# Altium PCB 1-PCB_PCB_Ecto-1.pcbdoc
Units mil, origin at the board's own origin, x right, y up, seen from the top; angles counter-clockwise.
Board outline 3925.2 x 4886.14 mil, 2 copper layers (Top Layer, Bottom Layer); 85 components, 55 nets, 284 pads, 72 vias.
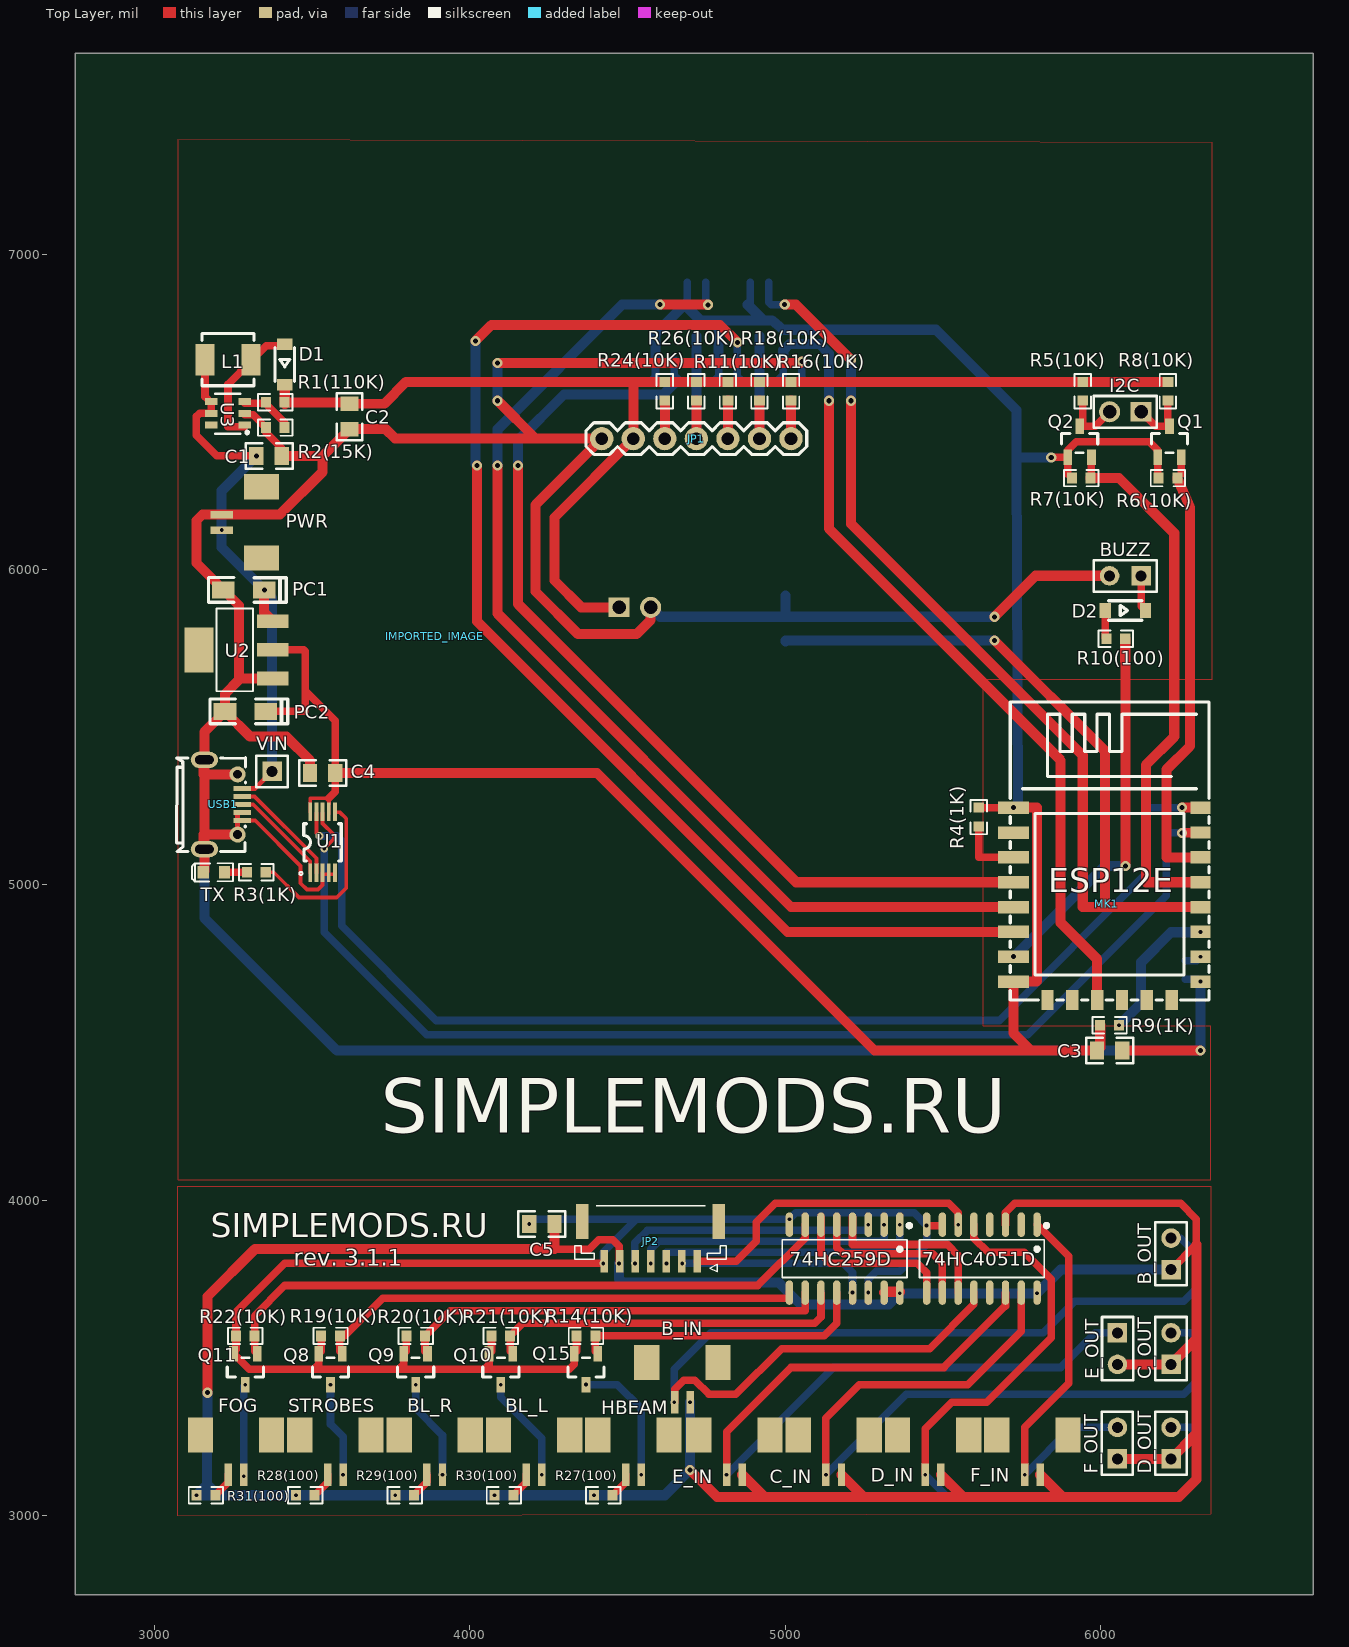
[diagram p0: Top Layer view]
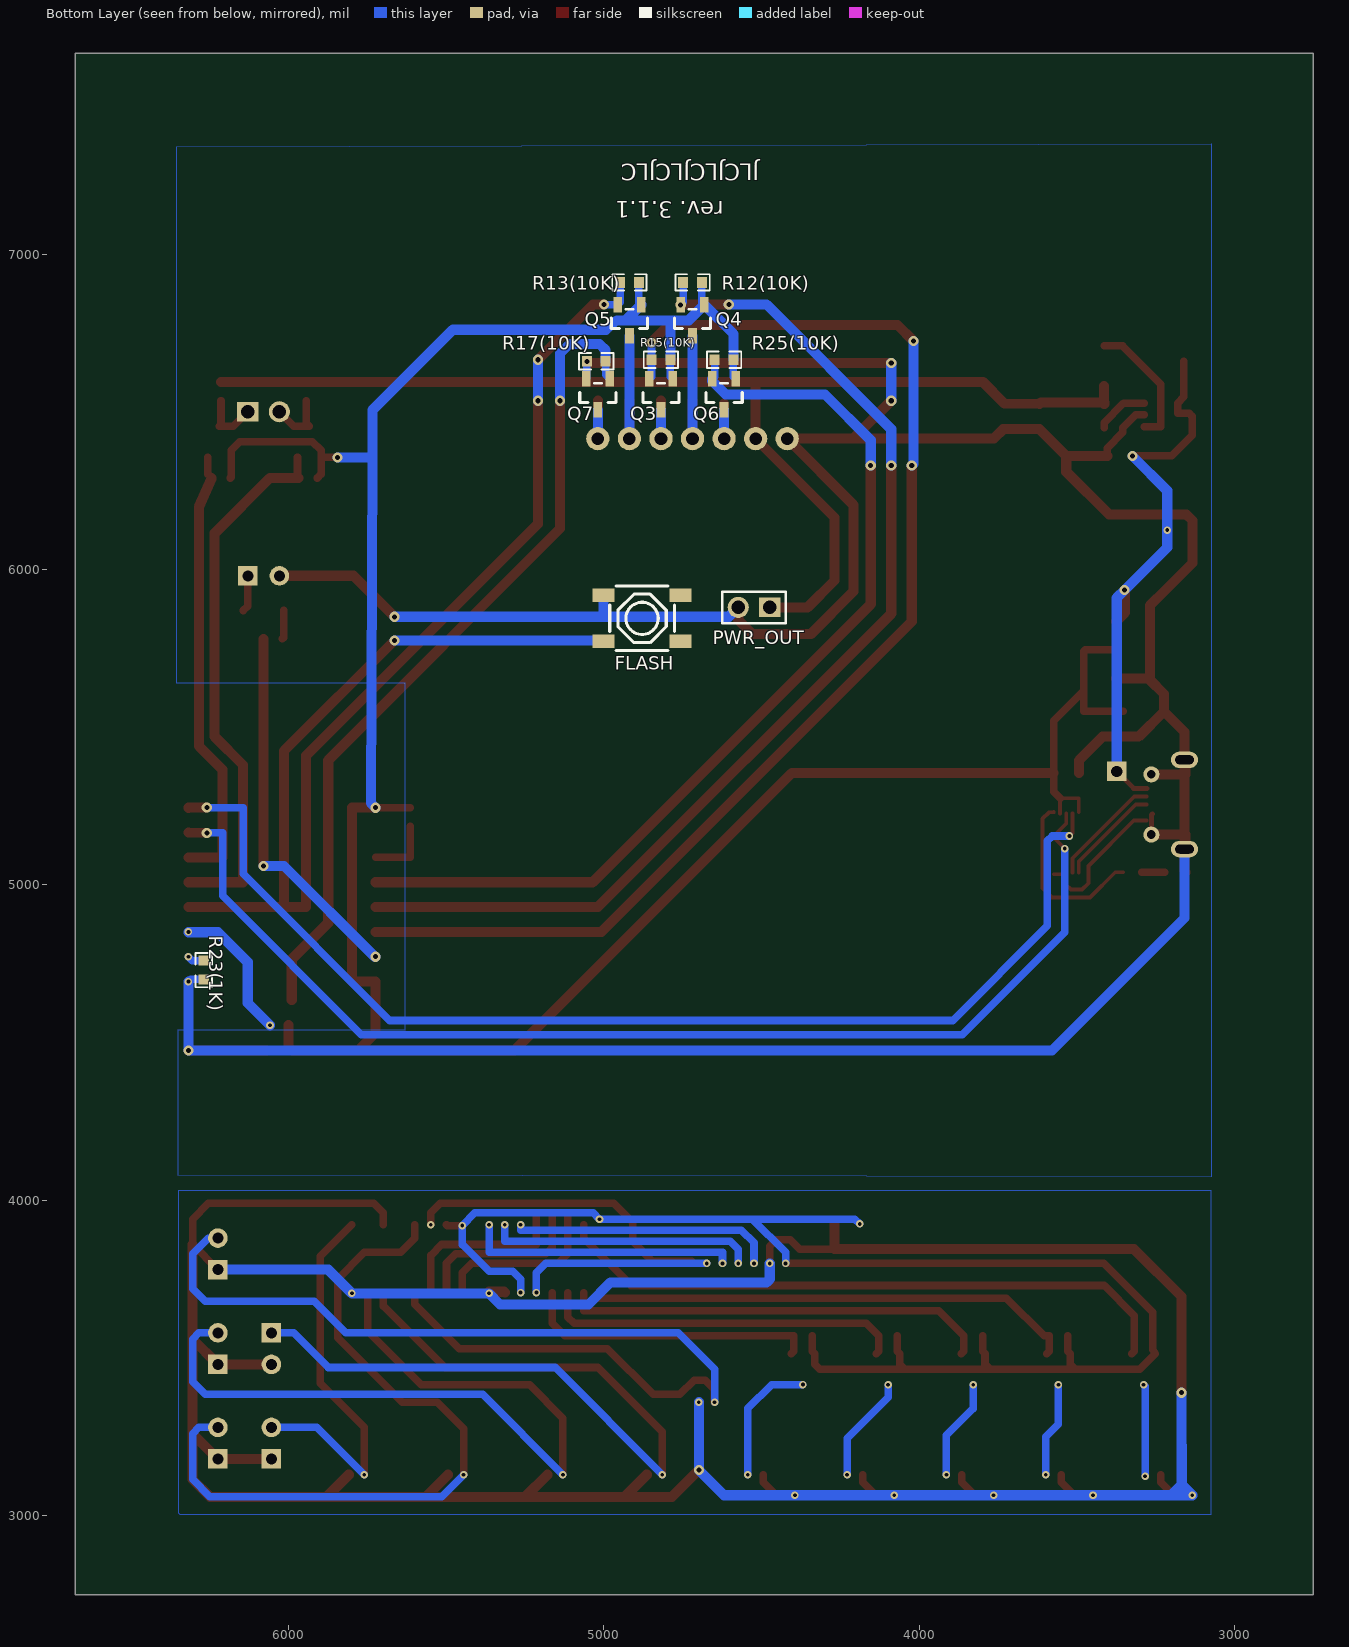
[diagram p1: Bottom Layer view, seen from below]

## Layer stack, top to bottom
Top Solder: solder mask 0.4, Solder Resist, Dk 3.5
Top Layer: signal copper 1.4
Dielectric 1: dielectric 12.6, FR-4, Dk 4.8
Bottom Layer: signal copper 1.4
Bottom Solder: solder mask 0.4, Solder Resist, Dk 3.5

## Board outline
6675.2,2750 2750,2750 2750,7636.14 6675.2,7636.14

## Design rules (kind name [scope] priority, off if disabled: settings)
AssemblyTestPointUsage [All] p0: scope1count=1 scope1_0_kind=Board scope1_0_value=Board scope2count=1 scope2_0_kind=Board scope2_0_value=Board commentlength=0
AssemblyTestpoint [All] p0: scope1count=1 scope1_0_kind=Board scope1_0_value=Board scope2count=1 scope2_0_kind=Board scope2_0_value=Board commentlength=0
Clearance [All] p0: scope1count=1 scope1_0_kind=Board scope1_0_value=Board scope2count=1 scope2_0_kind=Board scope2_0_value=Board commentlength=0 gap=10
Clearance [All] p1: gap=10 ignorepadtopadclearanceinfootprint=FALSE except(0: Arc-Hole Track-Hole SMDPad-Hole THPad-Hole Via-Hole Fill-Hole Poly-Hole Region-Hole Text-Hole)
ComponentClearance [All] p0: scope1count=1 scope1_0_kind=Board scope1_0_value=Board scope2count=1 scope2_0_kind=Board scope2_0_value=Board commentlength=0 gap=10 collisioncheckmode=3
DiffPairsRouting [All] p0: scope1count=1 scope1_0_kind=Board scope1_0_value=Board scope2count=1 scope2_0_kind=Board scope2_0_value=Board commentlength=0
FabricationTestPointUsage [All] p0: scope1count=1 scope1_0_kind=Board scope1_0_value=Board scope2count=1 scope2_0_kind=Board scope2_0_value=Board commentlength=0 valid=0 allowmultiple=FALSE
FabricationTestpoint [All] p0: scope1count=1 scope1_0_kind=Board scope1_0_value=Board scope2count=1 scope2_0_kind=Board scope2_0_value=Board commentlength=0 side=3 testpointundercomponent=TRUE minsize=40 maxsize=100 preferedsize=60 minholesize=0 maxholesize=40 preferedholesize=32 testpointgrid=1
FanoutControl Fanout_BGA [All] p0 off: scope1count=1 scope1_0_kind=Board scope1_0_value=Board scope2count=1 scope2_0_kind=Board scope2_0_value=Board commentlength=69 // Protel DXP Scope 1 Expression Was: IsBGA   Fanout_BGA (Default Rule)
FanoutControl Fanout_LCC [All] p0 off: scope1count=1 scope1_0_kind=Board scope1_0_value=Board scope2count=1 scope2_0_kind=Board scope2_0_value=Board commentlength=69 // Protel DXP Scope 1 Expression Was: IsLCC   Fanout_LCC (Default Rule)
FanoutControl Fanout_SOIC [All] p0 off: scope1count=1 scope1_0_kind=Board scope1_0_value=Board scope2count=1 scope2_0_kind=Board scope2_0_value=Board commentlength=71 // Protel DXP Scope 1 Expression Was: IsSOIC   Fanout_SOIC (Default Rule)
FanoutControl Fanout_Small [All] p0 off: scope1count=1 scope1_0_kind=Board scope1_0_value=Board scope2count=1 scope2_0_kind=Board scope2_0_value=Board commentlength=84 // Protel DXP Scope 1 Expression Was: (CompPinCount < 5)   Fanout_Small (Default Rule)
FanoutControl Fanout_Default [All] p0: scope1count=1 scope1_0_kind=Board scope1_0_value=Board scope2count=1 scope2_0_kind=Board scope2_0_value=Board commentlength=30 // Fanout_Default (Default Rule)
Height [All] p0: scope1count=1 scope1_0_kind=Board scope1_0_value=Board scope2count=1 scope2_0_kind=Board scope2_0_value=Board commentlength=0
HoleSize [All] p0: scope1count=1 scope1_0_kind=Board scope1_0_value=Board scope2count=1 scope2_0_kind=Board scope2_0_value=Board commentlength=0 absolutevalues=TRUE maxlimit=100 minlimit=1 maxpercent=80.000 minpercent=20.000
HoleToHoleClearance [All] p0: scope1count=1 scope1_0_kind=Board scope1_0_value=Board scope2count=1 scope2_0_kind=Board scope2_0_value=Board commentlength=0
LayerPairs [All] p0: scope1count=1 scope1_0_kind=Board scope1_0_value=Board scope2count=1 scope2_0_kind=Board scope2_0_value=Board commentlength=0 enforce=TRUE
MinimumSolderMaskSliver [All] p0: scope1count=1 scope1_0_kind=Board scope1_0_value=Board scope2count=1 scope2_0_kind=Board scope2_0_value=Board commentlength=0
NetAntennae [All] p0: scope1count=1 scope1_0_kind=Board scope1_0_value=Board scope2count=1 scope2_0_kind=Board scope2_0_value=Board commentlength=0
PasteMaskExpansion [All] p0: scope1count=1 scope1_0_kind=Board scope1_0_value=Board scope2count=1 scope2_0_kind=Board scope2_0_value=Board commentlength=0 expansion=0
PlaneClearance [All] p0: scope1count=1 scope1_0_kind=Board scope1_0_value=Board scope2count=1 scope2_0_kind=Board scope2_0_value=Board commentlength=0 clearance=20
PlaneConnect [All] p0: scope1count=1 scope1_0_kind=Board scope1_0_value=Board scope2count=1 scope2_0_kind=Board scope2_0_value=Board commentlength=0 planeconnectstyle=Relief reliefexpansion=20 reliefentries=4 reliefconductorwidth=10 reliefairgap=10
PolygonConnect [All] p0: scope1count=1 scope1_0_kind=Board scope1_0_value=Board scope2count=1 scope2_0_kind=Board scope2_0_value=Board commentlength=0 connectstyle=Relief reliefconductorwidth=10 reliefentries=4 polygonreliefangle="90 Angle"
PolygonConnect [All] p1: connectstyle=Relief reliefconductorwidth=10 reliefentries=4 polygonreliefangle="90 Angle" airgapwidth=10
RoutingCorners [All] p0: scope1count=1 scope1_0_kind=Board scope1_0_value=Board scope2count=1 scope2_0_kind=Board scope2_0_value=Board commentlength=0 cornerstyle=45-Degree minsetback=100 maxsetback=100
RoutingLayers [All] p0: scope1count=1 scope1_0_kind=Board scope1_0_value=Board scope2count=1 scope2_0_kind=Board scope2_0_value=Board commentlength=0 top layer=Automatic bottom layer=Automatic
RoutingPriority [All] p0: scope1count=1 scope1_0_kind=Board scope1_0_value=Board scope2count=1 scope2_0_kind=Board scope2_0_value=Board commentlength=0
RoutingTopology [All] p0: scope1count=1 scope1_0_kind=Board scope1_0_value=Board scope2count=1 scope2_0_kind=Board scope2_0_value=Board commentlength=0 topology=Shortest
RoutingVias [All] p0: scope1count=1 scope1_0_kind=Board scope1_0_value=Board scope2count=1 scope2_0_kind=Board scope2_0_value=Board commentlength=0 holewidth=28 width=50 viastyle="Through Hole" minholewidth=28 minwidth=50 maxholewidth=28 maxwidth=50
RoutingVias [All] p1: holewidth=28 width=50 viastyle="Through Hole" minholewidth=28 minwidth=50 maxholewidth=28 maxwidth=50
ShortCircuit [All] p0: scope1count=1 scope1_0_kind=Board scope1_0_value=Board scope2count=1 scope2_0_kind=Board scope2_0_value=Board commentlength=0 allowed=FALSE
SilkToBoardRegionClearance [All] p0: scope1count=1 scope1_0_kind=Board scope1_0_value=Board scope2count=1 scope2_0_kind=Board scope2_0_value=Board commentlength=0
SilkToSilkClearance [All] p0: scope1count=1 scope1_0_kind=Board scope1_0_value=Board scope2count=1 scope2_0_kind=Board scope2_0_value=Board commentlength=0
SilkToSolderMaskClearance [All] p0 off: scope1count=1 scope1_0_kind=Board scope1_0_value=Board scope2count=1 scope2_0_kind=Board scope2_0_value=Board commentlength=44 // Protel DXP Scope 1 Expression Was: IsPad
SolderMaskExpansion [All] p0: scope1count=1 scope1_0_kind=Board scope1_0_value=Board scope2count=1 scope2_0_kind=Board scope2_0_value=Board commentlength=0 expansion=4
SolderMaskExpansion [All] p1: expansion=4 istentingtop=FALSE
UnRoutedNet [All] p0: scope1count=1 scope1_0_kind=Board scope1_0_value=Board scope2count=1 scope2_0_kind=Board scope2_0_value=Board commentlength=0
UnpouredPolygon [All] p0: scope1count=1 scope1_0_kind=Board scope1_0_value=Board scope2count=1 scope2_0_kind=Board scope2_0_value=Board commentlength=0
Width [All] p0: scope1count=1 scope1_0_kind=Board scope1_0_value=Board scope2count=1 scope2_0_kind=Board scope2_0_value=Board commentlength=0 maxlimit=10 minlimit=10 preferedwidth=10
Width [All] p1: maxlimit=10 minlimit=10 preferedwidth=10
30 further rules are at their usual default settings.

## Components (designator, comment, footprint, x,y, rotation, side; value= is the part's Value field where it differs from the comment)
74HC259D "74HC259D,653" SOIC-16_L9.9-W3.9-P1.27-LS6.0-BL 5188.74,3815 r180 top
74HC4051D "74HC4051D" SOIC-16_L9.9-W3.9-P1.27-LS6.0-BL 5623.74,3815 r180 top
B_IN "Siren IN" JST_1.25MM_2P_SMD 4698.74,3360 r180 top
B_OUT "Siren OUT" HDR-F-2.54_1X2 6223.74,3830 r90 top
BL_L "Left Blink Mod" JST_1.25MM_2P_SMD 4228.74,3130 r180 top
BL_R "Right Blink Mod" JST_1.25MM_2P_SMD 3913.74,3130 r180 top
BUZZ "SPEAKER" HDR-F-2.54_1X2 6078.74,5980 r180 top
C1 "22uF" 0805 3363.74,6360 r180 top
C2 "22uF" 0805 3618.74,6485 r90 top
C3 "22uF" 0805 6028.74,4475 r180 top
C4 "22uF" 0805 3533.74,5355 r180 top
C5 "22uF" 0805 4228.74,3925 r0 top
C_IN "Roof Light IN" JST_1.25MM_2P_SMD 5178.74,3130 r180 top
C_OUT "Roof Light OUT" HDR-F-2.54_1X2 6223.74,3530 r90 top
D1 "SCHOTTKY" SOD-123 3413.74,6650 r90 top
D2 "SCTK" SOD-123 6078.74,5870 r180 top
D_IN "Engine IN" JST_1.25MM_2P_SMD 5493.74,3130 r180 top
D_OUT "Engine OUT" HDR-F-2.54_1X2 6223.74,3230 r90 top
E_IN "Horn IN" JST_1.25MM_2P_SMD 4863.74,3130 r180 top
E_OUT "Horn OUT" HDR-F-2.54_1X2 6053.74,3530 r270 top
F_IN "Main Light IN" JST_1.25MM_2P_SMD 5808.74,3130 r180 top
F_OUT "Main Light OUT" HDR-F-2.54_1X2 6053.74,3230 r90 top
FLASH "K2-3.6×6.1_SMD" SW-SMD_4P-L5.2-W5.2-P3.70-LS6.5 4878.74,5845 r0 bottom
FOG "Fog Lights Mod" JST_1.25MM_2P_SMD 3283.74,3130 r180 top
HBEAM "High Beam Mod" JST_1.25MM_2P_SMD 4543.74,3130 r180 top
I2C "HDR-F-2.54_1x2" HDR-M-2.54_1X2 6078.74,6500 r180 top
IMPORTED_IMAGE "IMPORTED_IMAGE" IMPORTED_IMAGE 3888.88,5787.83 r0 top
JP1 "MAIN" 1X07 4718.74,6415 r180 top
JP2 "SUB" JST_GH_SM07B-GHS-TB_07X1.25MM_ANGLED 4573.74,3870 r180 top
L1 "4.7uH" FXL0420 3233.74,6665 r0 top
MK1 "ESP-12E" WIFIM-SMD_ESP-12E 6028.74,4940 r0 top
PC1 "10uF/16V" CASE-A_3216 3283.74,5935 r0 top
PC2 "10uF/16V" CASE-A_3216 3288.74,5550 r0 top
PWR "HDR-F-2.54_1x2" JST_1.25MM_2P_SMD 3213.74,6125 r90 top
PWR_OUT "HDR-F-2.54_1x2" HDR-M-2.54_1X2 4523.74,5880 r0 bottom
Q1 "BSS138" SOT-23-3_L2.9-W1.6-P1.90-LS2.8-BR 6218.74,6405 r270 top
Q2 "BSS138" SOT-23-3_L2.9-W1.6-P1.90-LS2.8-BR 5933.74,6405 r270 top
Q3 "BSS138" SOT-23-3_L2.9-W1.6-P1.90-LS2.8-BR 4818.74,6555 r90 bottom
Q4 "BSS138" SOT-23-3_L2.9-W1.6-P1.90-LS2.8-BR 4718.74,6790 r90 bottom
Q5 "BSS138" SOT-23-3_L2.9-W1.6-P1.90-LS2.8-BR 4918.74,6790 r90 bottom
Q6 "BSS138" SOT-23-3_L2.9-W1.6-P1.90-LS2.8-BR 4618.74,6555 r90 bottom
Q7 "BSS138" SOT-23-3_L2.9-W1.6-P1.90-LS2.8-BR 5018.74,6555 r90 bottom
Q8 "BSS138" SOT-23-3_L2.9-W1.6-P1.90-LS2.8-BR 3558.74,3465 r90 top
Q9 "BSS138" SOT-23-3_L2.9-W1.6-P1.90-LS2.8-BR 3828.74,3465 r90 top
Q10 "BSS138" SOT-23-3_L2.9-W1.6-P1.90-LS2.8-BR 4098.74,3465 r90 top
Q11 "BSS138" SOT-23-3_L2.9-W1.6-P1.90-LS2.8-BR 3288.74,3465 r90 top
Q15 "BSS138" SOT-23-3_L2.9-W1.6-P1.90-LS2.8-BR 4368.74,3465 r90 top
R1(110K) "110k" R0603 3383.74,6530 r180 top
R2(15K) "15k" R0603 3383.74,6450 r180 top
R3(1K) "1k" R0603 3323.74,5040 r180 top
R4(1K) "1k" R0603 5613.74,5215 r90 top
R5(10K) "10k" R0603 5943.74,6565 r270 top
R6(10K) "10k" R0603 6213.74,6290 r0 top
R7(10K) "10k" R0603 5938.74,6290 r0 top
R8(10K) "10k" R0603 6213.74,6565 r270 top
R9(1K) "1k" R0603 6028.74,4555 r180 top
R10(100) "100" R0603 6048.74,5780 r0 top
R11(10K) "10k" R0603 4818.74,6565 r270 top
R12(10K) "10k" R0603 4718.74,6910 r0 bottom
R13(10K) "10k" R0603 4918.74,6910 r0 bottom
R14(10K) "10k" R0603 4368.74,3570 r180 top
R15(10K) "10k" R0603 4818.74,6665 r0 bottom
R16(10K) "10k" R0603 5018.74,6565 r270 top
R17(10K) "10k" R0603 5023.74,6660 r0 bottom
R18(10K) "10k" R0603 4918.74,6565 r270 top
R19(10K) "10k" R0603 3558.74,3570 r180 top
R20(10K) "10k" R0603 3828.74,3570 r180 top
R21(10K) "10k" R0603 4098.74,3570 r180 top
R22(10K) "10k" R0603 3288.74,3570 r180 top
R23(1K) "1k" R0603 6268.74,4730 r270 bottom
R24(10K) "10k" R0603 4618.74,6565 r270 top
R25(10K) "10k" R0603 4618.74,6665 r0 bottom
R26(10K) "10k" R0603 4718.74,6565 r270 top
R27(100) "100" R0603 4423.74,3065 r0 top
R28(100) "100" R0603 3478.74,3065 r0 top
R29(100) "100" R0603 3793.74,3065 r0 top
R30(100) "100" R0603 4108.74,3065 r0 top
R31(100) "100" R0603 3163.74,3065 r0 top
STROBES "Strobes Mod" JST_1.25MM_2P_SMD 3598.74,3130 r180 top
TX "LED-0603_B" LED0603_BLUE 3188.74,5040 r180 top
U1 "CH340E" MSOP-10_L3.0-W3.0-P0.50-LS5.0-BL 3533.74,5135 r0 top
U2 "LM1117GSF-3.3" SOT-223-3_L6.5-W3.4-P2.30-LS7.0-BR 3258.74,5745 r0 top
U3 "MT3608" SOT-23-6 3233.74,6495 r180 top
USB1 "MICRO" MICRO-USB-SMD_MICROXNJ 3218.76,5254.95 r270 top
VIN "HDR-M-2.54_1x1" HDR-M-2.54_1X1 3373.74,5360 r0 top

## Footprints (in the part's own frame and the unit in brackets; to place one, negate y for a bottom-side part, rotate by r counter-clockwise, add the part's x,y. Pads: shape width x height; smd on the part's side, far side on the other; paste and mask are expansions set on the pad)
1X07 [mil]
  round 74 hole 40 mask+0: 1(-300,0) 2(-200,0) 3(-100,0) 4(0,0) 5(100,0) 6(200,0) 7(300,0)
  silkscreen extent -350,-50 350,50
0805 [mm]
  rect 1.16x1.45 smd mask+0: 1(-1.016,0) 2(1.016,0)
  silkscreen extent -1.9,-1.03 1.87,1.04
CASE-A_3216 [mil]
  rect 71.5x53.5 smd mask+0: 1(64.5,0) 2(-64.5,0)
  silkscreen extent -112,-39 134,40
FXL0420 [mm]
  rect 1.5x2.5 smd mask+0: 1(1.85,0) 2(-1.85,0)
  silkscreen extent -2.1,-2.1 2.1,2.1
HDR-F-2.54_1X2 [mil]
  rect 62x62 hole 35 mask+0: 1(-50,0)
  round 62 hole 35 mask+0: 2(50,0)
  silkscreen extent -100,-49 100,50
HDR-M-2.54_1X1 [mil]
  rect 62x62 hole 35 mask+0: 1(0,0)
  silkscreen extent -50,-50 50,50
HDR-M-2.54_1X2 [mm]
  rect 1.7x1.575 hole 1.1 mask+0: 1(-1.27,0)
  round 1.7 hole 1.1 mask+0: 2(1.27,0)
  silkscreen extent -2.54,-1.27 2.54,1.27
IMPORTED_IMAGE [mil]
JST_1.25MM_2P_SMD [mm]
  rect 0.6x1.8 smd mask+0: 1(0,0) 2(1.25,0)
  rect 2.032x2.8 smd mask+0: 3(-2.24,-3.2) 4(3.49,-3.2)
JST_GH_SM07B-GHS-TB_07X1.25MM_ANGLED [mm]
  rect 0.6x1.8 smd mask+0: 1(-3.75,1.6) 2(-2.5,1.6) 3(-1.251,1.6) 4(0.001,1.6) 5(1.25,1.6) 6(2.5,1.6) 7(3.751,1.6)
  rect 1x2.8 smd mask+0: 8(-5.5,-1.6) 9(5.501,-1.6)
  silkscreen extent -6.1,-2.85 6.1,2.45
LED0603_BLUE [mm]
  rect 0.9x1 smd mask+0: 1(-0.85,0) 2(0.85,0)
  silkscreen extent -1.54,-0.73 1.75,0.73
MICRO-USB-SMD_MICROXNJ [mm]
  rect 0.4x1.4 smd mask+0: 1(-1.3,1.521) 2(-0.65,1.521) 3(0,1.521) 4(0.65,1.521) 5(1.3,1.521)
  round 1.3 hole 0.7 mask+0: 6(2.425,1.149) 9(-2.425,1.149)
  oval 1.3x2.2 hole 0.7 slot 1.5 at 90 deg mask+0: 7(3.6,-1.521)
  oval 1.3x2.2 hole 0.7 slot 1.5 at 90 deg copper offset 0,0 mask+0: 8(-3.6,-1.521)
  silkscreen extent -3.76,-3.78 3.8,1.79
MSOP-10_L3.0-W3.0-P0.50-LS5.0-BL [mil]
  rect 12x59.05 smd mask+0: 1(-39.37,-96.5) 2(-19.68,-96.5) 3(0,-96.5) 4(19.69,-96.5) 5(39.37,-96.5) 6(39.37,96.5) 7(19.69,96.5) 8(0,96.5) 9(-19.68,96.5) 10(-39.37,96.5)
  silkscreen extent -74,-103 59,59
R0603 [mil]
  rect 31.75x34.02 smd mask+0: 1(-29.66,0) 2(29.66,0)
  silkscreen extent -55,-26 55,26
SOD-123 [mil]
  rect 35.8x48 smd mask+0: 1(64,0) 2(-64,0)
  silkscreen extent -53,-31 53,31
SOIC-16_L9.9-W3.9-P1.27-LS6.0-BL [mil]
  oval 23.7x77.6 smd mask+0: 1(-175,-107.7) 2(-125,-107.7) 3(-75,-107.7) 4(-25,-107.7) 5(25,-107.7) 6(75,-107.7) 7(125,-107.7) 8(175,-107.7) 9(175,107.7) 10(125,107.7) 11(75,107.7) 12(25,107.7) 13(-25,107.7) 14(-75,107.7) 15(-125,107.7) 16(-175,107.7)
  silkscreen extent -211,-111 198,60
SOT-23-3_L2.9-W1.6-P1.90-LS2.8-BR [mm]
  rect 1.25x0.7 smd mask+0: 1(1.25,-0.95) 2(1.25,0.95) 3(-1.25,0)
  silkscreen extent -0.65,-1.46 0.9,1.46
SOT-23-6 [mm]
  rect 1x0.55 smd mask+0: 1(-1.35,0.95) 2(-1.35,0) 3(-1.35,-0.95) 4(1.35,-0.95) 5(1.35,0) 6(1.35,0.95)
  silkscreen extent -1.67,-1.56 1.01,1.67
SOT-223-3_L6.5-W3.4-P2.30-LS7.0-BR [mm]
  rect 2.5x1.1 smd mask+0: 1(2.97,-2.3) 2(2.97,0) 3(2.97,2.3)
  rect 2.34x3.6 smd mask+0: 4(-2.97,0)
  silkscreen extent -1.57,-3.33 1.37,3.33
SW-SMD_4P-L5.2-W5.2-P3.70-LS6.5 [mm]
  rect 1.8x1.1 smd mask+0: 1(-3.1,1.85) 2(3.1,1.85) 3(-3.1,-1.85) 4(3.1,-1.85)
  silkscreen extent -2.6,-2.6 2.6,2.6
WIFIM-SMD_ESP-12E [mm]
  rect 2.5x1 smd mask+0: 1(-7.75,7.74) 2(-7.75,5.74) 3(-7.75,3.74) 4(-7.75,1.74) 5(-7.75,-0.26) 6(-7.75,-2.26) 7(-7.75,-4.26) 8(-7.75,-6.26)
  rect 1x1.6 smd mask+0: 9(-5.001,-7.74) 10(-3.001,-7.739) 11(-1.001,-7.739) 12(0.999,-7.739) 13(2.999,-7.739) 14(4.999,-7.74)
  rect 1.637x1 smd mask+0: 15(7.318,-6.26) 16(7.318,-4.26) 17(7.318,-2.26) 18(7.318,-0.26) 19(7.318,1.74) 20(7.318,3.74) 21(7.318,5.74) 22(7.318,7.74)
  silkscreen extent -8,-7.74 8,16.26

## Via types
v1: diameter 24, hole 12, Top Layer to Bottom Layer, 45 vias
v2: diameter 32, hole 16, Top Layer to Bottom Layer, 27 vias

## Nets (pads, with @x,y where several pads share a name; then routed paths per layer and width w, separated by ;. In a path a pad name is that pad's centre, name@x,y a point inside that pad or via, vN(x,y) a via of type N, cw(c..) or ccw(c..) an arc to the next point about the centre after c; other vN are vias at no path point)
3.3V: C4.1 MK1.8 PC2.1 Q1.1 Q2.1 Q3.1 Q4.1 Q5.1 Q6.1 R6(10K).1 R7(10K).1 R12(10K).1 R13(10K).1 R15(10K).1 R25(10K).1 U1.7 U1.10 U2.2 | length 8667.1
  Top Layer w12: U1.10@3494.34,5231.5 3494.34,5274.8 3553.54,5274.8 U1.7@3553.44,5226.5
  Top Layer w24: PC2.1 3478.74,5550 3478.74,5740 3473.74,5745 U2.2 ; 3478.74,5615 3573.74,5520 C4.1 3573.74,5295 3553.54,5274.8 ; 5613.74,5244.7 v2(5723.64,5244.7) ; v2(5843.74,6355) Q2.1 ; 5909.09,6290 5896.34,6302.75 Q2.1 ; 6184.09,6290 6181.34,6292.75 Q1.1 6181.34,6377.4 6153.74,6405 5923.74,6405 5896.34,6377.6 Q2.1
  Top Layer w32: C4.1 4403.74,5355 5283.74,4475 5778.74,4475 ; MK1.8 5723.62,4530.12 5778.74,4475 ; MK1.8 5797.24,4693.5 5798.74,4695 5798.74,5245 v2(5723.64,5244.7) ; 5999.08,4555 5999.08,4485.34 5988.74,4475 5778.74,4475
  Bottom Layer w24: Q6.1 4589.08,6611.94 4589.08,6665 ; Q4.1 4689.08,6846.94 4689.08,6910 ; Q3.1 4789.08,6611.94 4789.08,6665 ; Q5.1 4889.09,6846.95 4889.09,6910
  Bottom Layer w32: 4589.08,6665 4589.08,6746.94 Q4.1 4730.54,6790 4930.54,6790 ; 4786.74,6790 4789.08,6787.66 4789.08,6665 ; Q5.1 4930.54,6790 ; v2(5723.64,5244.7) 5738.74,5259.8 5733.74,6355 ; v2(5843.74,6355) 5733.74,6355 ; 4930.54,6790 4958.74,6790 4993.74,6760 5478.74,6760 5733.74,6505 5733.74,6355
5V: 74HC259D.15 74HC259D.16 74HC4051D.3 74HC4051D.16 C5.2 E_OUT.2 JP1.6 JP2.6 R1(110K).1 R5(10K).1 R8(10K).1 R11(10K).1 R16(10K).1 R18(10K).1 R24(10K).1 R26(10K).1 R27(100).1 R28(100).1 R29(100).1 R30(100).1 R31(100).1 | length 14124.2
  Top Layer w24: 4268.74,3845 4378.74,3845 4408.74,3875 4453.74,3875 4473.74,3855 v1(4473.74,3800) ; 74HC4051D.3 5698.74,3960 5728.74,3990 6253.74,3990 6303.74,3940 6303.74,3860 6223.74,3780
  Top Layer w32: v2(3168.74,3390) 3168.74,3695 3318.74,3845 4268.74,3845 C5.2 ; 3413.4,6525 3413.74,6525.34 3413.74,6581 ; 3413.4,6530 3613.74,6530 3618.74,6525 3729.84,6525.7 3798.14,6595 4518.74,6595 4518.74,6594.7 ; 4473.74,5880 4353.74,5880 4268.74,5965 4268.74,6165 JP1.6 4518.74,6594.7 ; v2(4698.74,3145) 4783.74,3060 4933.74,3060 ; 4863.74,3130 4933.74,3060 ; 5018.74,6594.65 5943.74,6594.65 6213.74,6594.65 ; 5018.74,6594.7 4518.74,6594.7 ; 5178.74,3130 5248.74,3060 ; 74HC259D.15 5316.44,3710 74HC259D.16@5363.74,3710 ; 5493.74,3130 5563.74,3060 ; 5808.74,3130 5878.74,3060 ; 6053.74,3180 6223.74,3180 6303.74,3260 ; E_OUT.2 6223.74,3480 6303.74,3560 ; 6303.74,3860 6303.74,3560 ; 4933.74,3060 5248.74,3060 ; 5248.74,3060 5563.74,3060 ; 5563.74,3060 5878.74,3060 ; 5878.74,3060 6248.74,3060 6303.74,3115 6303.74,3260 ; 6303.74,3260 6303.74,3560
  Bottom Layer w32: v1(3134.08,3065) v1(3449.08,3065) v1(3764.08,3065) v1(4079.08,3065) v1(4394.08,3065) 4618.74,3065 v2(4698.74,3145) v1(4698.74,3360) ; 3167.84,3098.2 3201.14,3065 ; 3167.84,3098.7 3134.04,3065 3167.74,3065 v2(3168.74,3390) ; v1(4473.74,3800) 4473.74,3750 4483.74,3740 4978.74,3740 5048.74,3670 5329.34,3670 v1(5363.74,3705) v1(5798.74,3705) 5873.74,3780 6223.74,3780
A: 74HC259D.4 74HC4051D.11 | length 554.9
  Top Layer w24: 74HC259D.4@5213.74,3947.7 5213.74,3860 5513.74,3860 5548.74,3825 74HC4051D.11
B: 74HC259D.5 74HC4051D.10 | length 546.1
  Top Layer w24: 74HC259D.5@5163.74,3947.7 5163.74,3850 5183.74,3830 5468.74,3830 5498.74,3800 74HC4051D.10
BL_L_1:  | length 338.8
  Bottom Layer w24: v1(4098.74,3415) 4098.74,3375 4228.74,3245 v1(4228.74,3130)
BL_L_2: BL_L.2 | length 82
  Top Layer w24: 4138.4,3065 4179.54,3106.14 BL_L.2
BL_R_2: BL_R.2 | length 82
  Top Layer w24: 3823.4,3065 3864.54,3106.14 BL_R.2
BUZZ_1: D2.2 | length 115.8
  Top Layer w24: 6128.74,5980 6128.74,5884 D2.2
BZR: MK1.7 | length 1194.4
  Top Layer w32: 6078.4,5780 6078.4,5710.34 6078.74,5710 v2(6078.74,5060)
  Bottom Layer w32: v2(5723.62,4772.28) 5726.04,4772.3 6013.74,5060 v2(6078.74,5060)
C: 74HC259D.6 74HC4051D.9 | length 540.3
  Top Layer w24: 74HC259D.6@5113.74,3947.7 5113.74,3830 5143.74,3800 5418.74,3800 5448.74,3770 74HC4051D.9
D2_1: R10(100).1 | length 91.8
  Top Layer w24: 6014.74,5870 6014.74,5784.34 6019.08,5780
D+: USB1.3 | length 326.4
  Top Layer w12: USB1.3 3313.74,5255 3494.36,5074.38 3494.36,5038.5
D-: U1.2 USB1.2 | length 362.8
  Top Layer w12: USB1.2@3278.63,5280.59 3318.15,5280.59 3514.05,5084.69 U1.2
FOG_2: FOG.2 | length 82
  Top Layer w24: 3193.4,3065 3234.54,3106.14 FOG.2
GND: 74HC259D.8 74HC259D.14 74HC4051D.7 74HC4051D.8 BUZZ.2 C1.1 C2.1 C3.1 FLASH.4 JP1.7 JP2.7 MK1.15 PWR.2 PWR_OUT.2 Q7.2 Q8.2 Q9.2 Q10.2 Q11.2 Q15.2 U1.3 U1.4 U1.5 U3.2 USB1.4 USB1.6 USB1.7 USB1.8 USB1.9 | length 17305.5
  Top Layer w12: 3278.63,5203.82 3319.92,5203.82 3463.74,5060 3463.74,5005 3483.74,4985 3518.74,4985 3533.74,5000 U1.3 ; U1.3@3533.74,5033.5 U1.5@3573.11,5033.5
  Top Layer w16: USB1.4@3261.04,5225 3263.97,5222.07 USB1.6
  Top Layer w24: U3.2@3286.9,6490 3314.08,6490 3354.08,6450 ; 3354.04,6450 3354.04,6434.7 3403.74,6385 C1.1 ; 3505.45,3465 3521.34,3480.89 Q8.2 3529.08,3521.94 3529.08,3570 ; 3775.45,3465 3791.34,3480.89 Q9.2 3799.08,3521.94 3799.08,3570 ; 4045.45,3465 4061.34,3480.89 Q10.2 4069.08,3521.94 4069.08,3570 ; 4338.74,3570 4338.74,3521.6 Q15.2 4331.34,3480.89 4315.45,3465 3300.54,3465 Q11.2 3259.08,3526.94 3259.08,3570 3259.08,3644.74 3414.34,3800 v1(4423.74,3800) ; v1(5448.74,3920) 5496.04,3920 74HC4051D.7
  Top Layer w32: 3155.24,5040 3158.85,5043.61 USB1.7@3158.85,5113.27 ; USB1.7@3156.14,5113.3 3156.14,5159.53 USB1.6 ; USB1.8@3156.14,5396.7 3156.14,5350.47 USB1.9@3263.97,5350.47 ; USB1.7@3156.18,5113.27 3158.85,5115.94 3158.85,5396.73 3158.85,5484.61 3224.24,5550 ; 3375.67,5654.45 3273.19,5654.45 3268.74,5650 ; C1.1 3533.74,6360 ; 3493.74,5355 3493.74,5395 3418.74,5470 3304.24,5470 3224.24,5550 ; v2(4088.74,6535) 4208.74,6415 JP1.7 ; v2(4088.74,6655) 5048.4,6655 v2(5053.44,6660) ; PWR_OUT.2 4573.74,5840 4528.74,5795 4343.74,5795 4208.74,5930 4208.74,6205 JP1.7 ; v2(5663.74,5850) 5793.74,5980 BUZZ.2 ; C3.1 v2(6316.84,4475) ; 3224.24,5550 3224.24,5605.5 3268.74,5650 ; 3268.74,5650 3268.74,5885.5 3219.24,5935 3133.74,6020.5 3133.74,6155 3152.94,6174.2 PWR.2 3397.94,6174.2 3533.74,6310 3533.74,6360 ; 3533.74,6360 C2.1 3733.74,6445 3763.74,6415 JP1.7
  Bottom Layer w24: v1(4188.74,3925) 4203.74,3940 4528.74,3940 ; v1(4423.74,3800) 4423.74,3835 4528.74,3940 ; v2(5053.44,6660) 5053.4,6606.94 Q7.2 ; v1(5263.74,3707.3) 5263.74,3750 5288.74,3775 5363.74,3775 5448.74,3860 v1(5448.74,3920) 5408.74,3960 5033.74,3960 v1(5013.74,3940) 4528.74,3940 ; 6268.74,4700.34 6310.06,4700.34 v1(6316.86,4693.54)
  Bottom Layer w32: USB1.7@3158.85,5113.27 3158.85,4894.89 3578.74,4475 v2(6316.84,4475) v1(6316.86,4693.54) ; v2(4088.74,6535) 4088.74,6555 v2(4088.74,6655) ; PWR_OUT.2 4603.74,5850 5000.84,5850 ; FLASH.4 5000.84,5850 ; v2(5663.74,5850) 5000.84,5850
HBEAM_2: HBEAM.2 | length 82
  Top Layer w24: 4453.4,3065 4494.54,3106.14 HBEAM.2
IO9: MK1.11 Q7.1 R17(10K).1 | length 2663.8
  Top Layer w32: v2(5138.74,6535) 5138.74,6130 5873.74,5395 5873.74,4880 5989.34,4764.4 MK1.11
  Bottom Layer w24: Q7.1 4994.08,6616.94 4994.08,6660
  Bottom Layer w32: 4994.04,6660 4994.04,6695.3 5013.74,6715 5108.84,6715 5138.74,6685.1 v2(5138.74,6535)
IO10: FLASH.2 MK1.18 Q5.2 | length 4767.5
  Top Layer w32: v2(4998.74,6840) 5033.74,6840 v2(5208.74,6665) ; v2(5208.74,6535) 5208.74,6145 5943.74,5410 5943.74,4930 MK1.18@6313.74,4930 ; v2(5663.74,5775) 6013.74,5425 6013.74,4929.8 MK1.18@6316.84,4929.8
  Bottom Layer w24: 4948.4,6910 4948.4,6846.94 Q5.2 v2(4998.74,6840)
  Bottom Layer w32: FLASH.2 5000.84,5775 v2(5663.74,5775) ; v2(5208.74,6535) v2(5208.74,6665)
IO12: MK1.6 Q3.2 | length 3991.9
  Top Layer w32: v2(4018.74,6725) 4068.74,6775 4793.74,6775 v2(4848.74,6720) ; v2(4023.74,6330) 4023.74,5835 5007.74,4851 MK1.6
  Bottom Layer w24: v2(4848.74,6720) 4848.74,6611.6 Q3.2
  Bottom Layer w32: v2(4018.74,6725) 4018.74,6335 v2(4023.74,6330)
IO14: MK1.5 Q4.2 | length 3510.6
  Top Layer w32: v2(4088.74,6330) 4088.74,5860 5018.94,4929.8 MK1.5 ; v2(4603.74,6840) 4755.34,6840 v2(4756.14,6839.2)
  Bottom Layer w24: 4748.4,6910 4748.4,6846.94 v2(4756.14,6839.2)
  Bottom Layer w32: v2(4088.74,6330) 4088.74,6445 4483.74,6840 v2(4603.74,6840)
IO16: MK1.4 Q6.2 | length 3105.9
  Top Layer w32: v2(4153.74,6330) 4153.74,5890 5035.24,5008.5 MK1.4
  Bottom Layer w24: 4648.4,6665 4648.4,6611.94 Q6.2
  Bottom Layer w32: v2(4153.74,6330) 4153.74,6410 4298.74,6555 4613.74,6555 4656.14,6597.4 Q6.2
L1_1: D1.1 U3.1 | length 418.2
  Top Layer w24: U3.1@3286.94,6452.6 3233.74,6452.6 3233.74,6587.2 3306.54,6660 3355.57,6709 D1.1@3413.74,6709
MK1_3: MK1.3 R4(1K).1 | length 208
  Top Layer w24: 5613.74,5185.3 5613.74,5087.2 MK1.3
MK1_16: MK1.16 R23(1K).1 | length 53.4
  Bottom Layer w24: 6268.74,4759.66 6304.23,4759.66 v1(6316.86,4772.29)
MK1_17: MK1.17 R9(1K).1 | length 457
  Bottom Layer w32: v1(6058.4,4555) 6128.74,4625.3 6128.74,4755 6223.74,4850 6315.84,4850 v1@6316.84,4851
  other v1: 6316.86,4851.03
OUT9(INV): 74HC4051D.6 | length 1199.2
  Top Layer w24: 4721.34,3807 4845.74,3807 4908.74,3870 4908.74,3930 4968.74,3990 5518.74,3990 5548.74,3960 v1(5548.74,3922.7)
  Top Layer w32: 5018.74,6415 5018.74,6535.34
  Bottom Layer w32: 5018.74,6415 5018.74,6505.8
OUT10: 74HC259D.13 JP1.2 JP2.2 | length 1061.3
  Top Layer w32: JP1.2 4918.74,6535.34
  Bottom Layer w24: v1(4673.74,3800) 5183.74,3800 5213.74,3770 v1(5213.74,3707.3)
  Bottom Layer w32: JP1.2 4918.74,6740.8
OUT12: JP1.3 JP2.3 | length 1073.5
  Top Layer w32: JP1.3 4818.74,6535
  Bottom Layer w24: v1(4623.74,3800) 4623.74,3835 5363.74,3835 v1(5363.74,3922.7)
  Bottom Layer w32: JP1.3 4818.74,6505.8
OUT14: 74HC259D.2 JP1.4 JP2.4 | length 1294.2
  Top Layer w32: JP1.4 4718.74,6535.34
  Bottom Layer w24: v1(4573.74,3800) 4573.74,3845 4598.84,3870 5313.74,3870 v1(5313.74,3922.7)
  Bottom Layer w32: JP1.4 4718.74,6740.8
OUT16: 74HC259D.3 JP1.5 JP2.5 | length 1050.4
  Top Layer w32: JP1.5@4618.74,6405.46 4618.74,6525.8
  Bottom Layer w24: v1(4523.74,3800) 4523.74,3865 4563.74,3905 5263.74,3905 v1(5263.74,3922.7)
  Bottom Layer w32: JP1.5 4618.74,6505.8
Q3: 74HC259D.7 Q11.1 R22(10K).1 | length 2013.1
  Top Layer w24: Q11.1 3318.4,3521.94 3318.4,3570 3318.4,3634.26 3414.14,3730 4913.74,3730 5063.74,3880 74HC259D.7
Q4: 74HC259D.9 Q8.1 R19(10K).1 | length 1551.4
  Top Layer w24: Q8.1 3588.4,3521.94 3588.4,3570 3603.74,3570 3723.74,3690 5013.74,3690 74HC259D.9
Q5: 74HC259D.10 Q9.1 R20(10K).1 | length 1354.8
  Top Layer w24: Q9.1 3858.4,3521.94 3858.4,3570 3938.4,3650 5063.74,3650 74HC259D.10
Q6: 74HC259D.11 Q10.1 R21(10K).1 | length 1146.5
  Top Layer w24: Q10.1 4128.4,3521.94 4128.4,3570 4168.4,3610 5093.74,3610 5113.74,3630 74HC259D.11
Q7: 74HC259D.12 Q15.1 R14(10K).1 | length 938.2
  Top Layer w24: 4398.4,3570 4398.4,3521.94 Q15.1 ; 4398.44,3570 5123.74,3570 5163.74,3610 74HC259D.12
Q9_3:  | length 320.2
  Bottom Layer w24: v1(3828.74,3415) 3828.74,3340 3913.74,3255 v1(3913.74,3130)
Q11_3:  | length 292.1
  Bottom Layer w24: v1(3283.74,3125) 3283.74,3410 v1(3288.74,3415)
Q15_3:  | length 416.4
  Bottom Layer w24: v1(4368.74,3415.8) 4467.94,3415.8 4543.74,3340 v1(4543.74,3130)
RXD: MK1.21 U1.8 | length 3698.4
  Top Layer w12: U1.8@3533.74,5226.5 3533.74,5195 3568.74,5160 3568.74,5145 v1(3538.74,5115)
  Top Layer w32: v2(6258.74,5165) MK1.21
  Bottom Layer w24: v1(3538.74,5115) 3538.74,4850 3863.74,4525 5768.74,4525 6208.74,4965 6208.74,5165 v2(6258.74,5165)
SCL(3.3V): MK1.20 Q1.2 | length 1421.3
  Top Layer w24: 6243.4,6290 6256.14,6302.74 Q1.2
  Top Layer w32: 6243.44,6290 6283.74,6197 6283.74,5440 6208.74,5365 6208.74,5087.3 MK1.20@6316.84,5087.3
SCL(5V):  | length 192.2
  Top Layer w24: 6128.74,6500 6174.54,6454.2 6218.74,6454.2 6213.74,6459.2 6213.74,6535.34
SDA(3.3V): MK1.19 Q2.2 | length 1721.6
  Top Layer w24: 5968.4,6290 5971.14,6292.74 Q2.2
  Top Layer w32: 5968.44,6290 6058.74,6290 6233.74,6115 6233.74,5470 6143.74,5380 6143.74,5008.5 MK1.19@6316.84,5008.5
SDA(5V): I2C.2 | length 199.3
  Top Layer w24: 5943.74,6535.34 5943.74,6464.2 5933.74,6454.2 5982.94,6454.2 I2C.2
STROBES_1:  | length 301.6
  Bottom Layer w24: v1(3558.74,3415) 3558.74,3290 3598.74,3250 v1(3598.74,3130)
STROBES_2: STROBES.2 | length 82
  Top Layer w24: 3508.4,3065 3549.54,3106.14 STROBES.2
TX_1: TX.1 | length 71.9
  Top Layer w24: TX.1 3294.08,5040
TXD: MK1.22 U1.9 | length 3671.7
  Top Layer w12: U1.9@3514.05,5226.5 3514.05,5164.69 v1(3523.74,5155)
  Top Layer w32: v2(6258.74,5245) MK1.22
  Bottom Layer w24: v1(3523.74,5155) 3578.74,5155 3593.74,5140 3593.74,4870 3893.74,4570 5678.74,4570 6143.74,5035 6143.74,5245 v2(6258.74,5245)
U1_6: R3(1K).1 U1.6 | length 565.4
  Top Layer w12: 3353.44,5040 3378.74,5040 3458.74,4960 3578.74,4960 3608.74,4990 3608.74,5210 3588.74,5230 3574.64,5230 U1.6
U3_3: R2(15K).1 U3.3 | length 167.8
  Top Layer w24: U3.3@3286.9,6527.4 3351.69,6527.4 3354.09,6525 ; 3354.04,6525 3413.4,6465.64 3413.4,6450
VIN: L1.2 PC1.1 U2.3 U3.4 USB1.1 | length 1841.2
  Top Layer w16: USB1.1@3278.63,5306.18 3319.92,5306.18 3373.74,5360
  Top Layer w24: L1.2@3160.9,6660 3160.9,6547.09 3180.59,6527.4 3180.59,6495 ; 3180.64,6495 3143.74,6495 3133.74,6485 3133.74,6425 3198.74,6360 v2(3323.74,6360)
  Top Layer w32: PC1.1 3348.24,5862.98 U2.3@3375.67,5835.55
  Bottom Layer w32: v2(3323.74,6360) 3213.74,6250 v1(3213.74,6125) 3213.74,6070 v2(3348.74,5935) 3373.74,5910 3373.74,5360
X1: 74HC4051D.14 E_IN.2 | length 2653.3
  Top Layer w24: v1(4814.54,3130) 4814.54,3265.8 5018.74,3470 5503.74,3470 5698.74,3665 74HC4051D.14
  Bottom Layer w24: v1(4814.54,3130) 5154.54,3470 5873.74,3470 5983.74,3580 6053.74,3580
X2: 74HC4051D.15 C_IN.2 C_OUT.2 | length 2554.6
  Top Layer w24: v1(5129.54,3130) 5129.54,3309.2 5235.34,3415 5578.74,3415 5748.74,3585 74HC4051D.15
  Bottom Layer w24: v1(5129.54,3130) 5384.54,3385 6263.74,3385 6303.74,3425 6303.74,3560 6283.74,3580 C_OUT.2
X3: 74HC4051D.12 B_IN.2 B_OUT.2 | length 3252.4
  Top Layer w24: B_IN.2 4649.54,3400.8 4678.74,3430 4713.74,3430 4758.74,3385 4843.74,3385 4988.74,3530 5458.74,3530 5598.74,3670 74HC4051D.12
  Bottom Layer w24: v1(4648.74,3360) 4648.74,3465 4763.74,3580 5818.74,3580 5918.74,3680 6263.74,3680 6303.74,3720 6303.74,3830 6253.74,3880 B_OUT.2
X4: F_IN.2 F_OUT.2 | length 1248.1
  Top Layer w24: v1(5759.54,3130) 5759.54,3280.8 5898.74,3420 5898.74,3822.7 5798.74,3922.7
  Bottom Layer w24: v1(5759.54,3130) 5909.54,3280 F_OUT.2
X5: 74HC4051D.5 D_IN.2 D_OUT.2 | length 2335.6
  Top Layer w24: v1(5444.54,3130) 5444.54,3275.8 5528.74,3360 5638.74,3360 5843.74,3565 5843.74,3750 5758.74,3835 5643.74,3835 5598.74,3880 74HC4051D.5
  Bottom Layer w24: v1(5444.54,3130) 5514.54,3060 6248.74,3060 6303.74,3115 6303.74,3260 6283.74,3280 D_OUT.2
pads on no net: 74HC259D.1 74HC4051D.1 74HC4051D.2 74HC4051D.4 74HC4051D.13 B_IN.1 B_IN.3 B_IN.4 B_OUT.1 BL_L.1 BL_L.3 BL_L.4 BL_R.1 BL_R.3 BL_R.4 BUZZ.1 C1.2 C2.2 C3.2 C4.2 C5.1 C_IN.1 C_IN.3 C_IN.4 C_OUT.1 D1.2 D2.1 D_IN.1 D_IN.3 D_IN.4 D_OUT.1 E_IN.1 E_IN.3 E_IN.4 E_OUT.1 F_IN.1 F_IN.3 F_IN.4 F_OUT.1 FLASH.1 FLASH.3 FOG.1 FOG.3 FOG.4 HBEAM.1 HBEAM.3 HBEAM.4 I2C.1 JP1.1 JP2.1 JP2.8 JP2.9 L1.1 MK1.1 MK1.2 MK1.9 MK1.10 MK1.12 MK1.13 MK1.14 PC1.2 PC2.2 PWR.1 PWR.3 PWR.4 PWR_OUT.1 Q1.3 Q2.3 Q3.3 Q4.3 Q5.3 Q6.3 Q7.3 Q8.3 Q9.3 Q10.3 Q11.3 Q15.3 R1(110K).2 R2(15K).2 R3(1K).2 R4(1K).2 R5(10K).2 R6(10K).2 R7(10K).2 R8(10K).2 R9(1K).2 R10(100).2 R11(10K).2 R12(10K).2 R13(10K).2 R14(10K).2 R15(10K).2 R16(10K).2 R17(10K).2 R18(10K).2 R19(10K).2 R20(10K).2 R21(10K).2 R22(10K).2 R23(1K).2 R24(10K).2 R25(10K).2 R26(10K).2 R27(100).2 R28(100).2 R29(100).2 R30(100).2 R31(100).2 STROBES.1 STROBES.3 STROBES.4 TX.2 U1.1 U2.1 U2.4 U3.5 U3.6 USB1.5 VIN.1

## Polygon pours and split planes (outlines as drawn)
GND on Top Layer "Top Layer-GND" (solid, remove dead copper, pour order 0): 3073.74,4045 6348.74,4045 6348.74,3005 3073.74,3000
GND on Top Layer "Top Layer-GND 1" (solid, remove dead copper, pour order 1): 3073.74,7362.5 3073.74,4065 6348.74,4065 6348.74,4552.5 5628.74,4552.5 5628.74,5652.5 6353.74,5652.5 6353.74,7352.5
GND on Bottom Layer "Bottom Layer-GND" (solid, remove dead copper, pour order 2): 3073.74,4030 6348.74,4030 6348.74,3010 6343.74,3005 3073.74,3005
GND on Bottom Layer "Bottom Layer-GND 1" (solid, remove dead copper, pour order 3): 3073.74,7350 3073.74,4075 6348.74,4080 6348.74,4540 5628.74,4540 5628.74,5640 6353.74,5640 6353.74,7340

## Silkscreen, mask and mechanical layers (free items; w line width, h text height)
Top Overlay:
  text "SIMPLEMODS.RU" at 3718.43,4214.72 h172.26
  text "SIMPLEMODS.RU" at 3179.61,3882.68 h76.56
  text "rev. 3.1.1" at 3442.9,3792.97 h52.63
Bottom Overlay:
  text "JLCJLCJLCJLC" at 4507.23,7287.03 h52.63 r180
  text "rev. 3.1.1" at 4619.25,7167.03 h52.63 r180
Mechanical 1:
  circle w1: c4323.74,4052.6 r9.84
  circle w1: c4383.74,4052.6 r9.84
  circle w1: c4443.74,4052.6 r9.84
  circle w1: c4503.74,4052.6 r9.84
  circle w1: c4563.74,4052.6 r9.84
  circle w1: c4623.74,4052.6 r9.84
  circle w1: c4683.74,4052.6 r9.84
  circle w1: c4743.74,4052.6 r9.84
  circle w1: c4803.74,4052.6 r9.84
  circle w1: c4863.74,4052.6 r9.84
  circle w1: c4923.74,4052.6 r9.84
  circle w1: c4983.74,4052.6 r9.84
  circle w1: c5043.74,4052.6 r9.84
  circle w1: c5103.74,4052.6 r9.84
  circle w1: c5933.07,4249.45 r78.74
  circle w1: c3492.13,6906.93 r78.74
  circle w1: c5933.07,6906.93 r78.74
  circle w1: c3492.13,4249.45 r78.74
  lines w1: 4338.58,5962.05 cw(c4712.6,5962.66) 5086.61,5962.05 4338.58,5962.05
  lines w10: 4338.58,5962.05 cw(c4712.6,5962.05) 5086.61,5962.05 4338.58,5962.05 ; 4338.58,5962.05 4338.58,5962.05 ; 6346.46,4308.5 cw(c6110.24,4308.5) 6110.24,4072.28 5125.98,4072.28 5125.98,4032.91 6346.46,4032.91 6346.46,3009.29 3078.74,3009.29 3078.74,4032.91 4299.21,4032.91 4299.21,4072.28 3314.96,4072.28 cw(c3314.96,4308.5) 3078.74,4308.5 3078.74,7103.78 cw(c3314.96,7103.78) 3314.96,7340 6110.24,7340 cw(c6110.24,7103.78) 6346.46,7103.78 ; 6346.44,4308.5 6346.44,4522.8 6346.44,7103.8 ; 6346.44,4308.5 6346.46,4308.5 ; 6346.44,7103.8 6346.46,7103.78

## Text inside footprints (layer, text, board x,y; h text height)
MK1: Top Overlay "ESP12E" at 5834.84,4976.37 h76.56
R25(10K): Bottom Paste "REF" at 4622,3890.36 h37.68 r180